# Altium PCB BDC_Motor_V01_220805_ASCII.PcbDoc
Units mil, origin at the board's own origin, x right, y up, seen from the top; angles counter-clockwise.
Board outline 3937.01 x 3937.01 mil, 2 copper layers (Top Layer, Bottom Layer); 91 components, 41 nets, 287 pads, 0 vias.
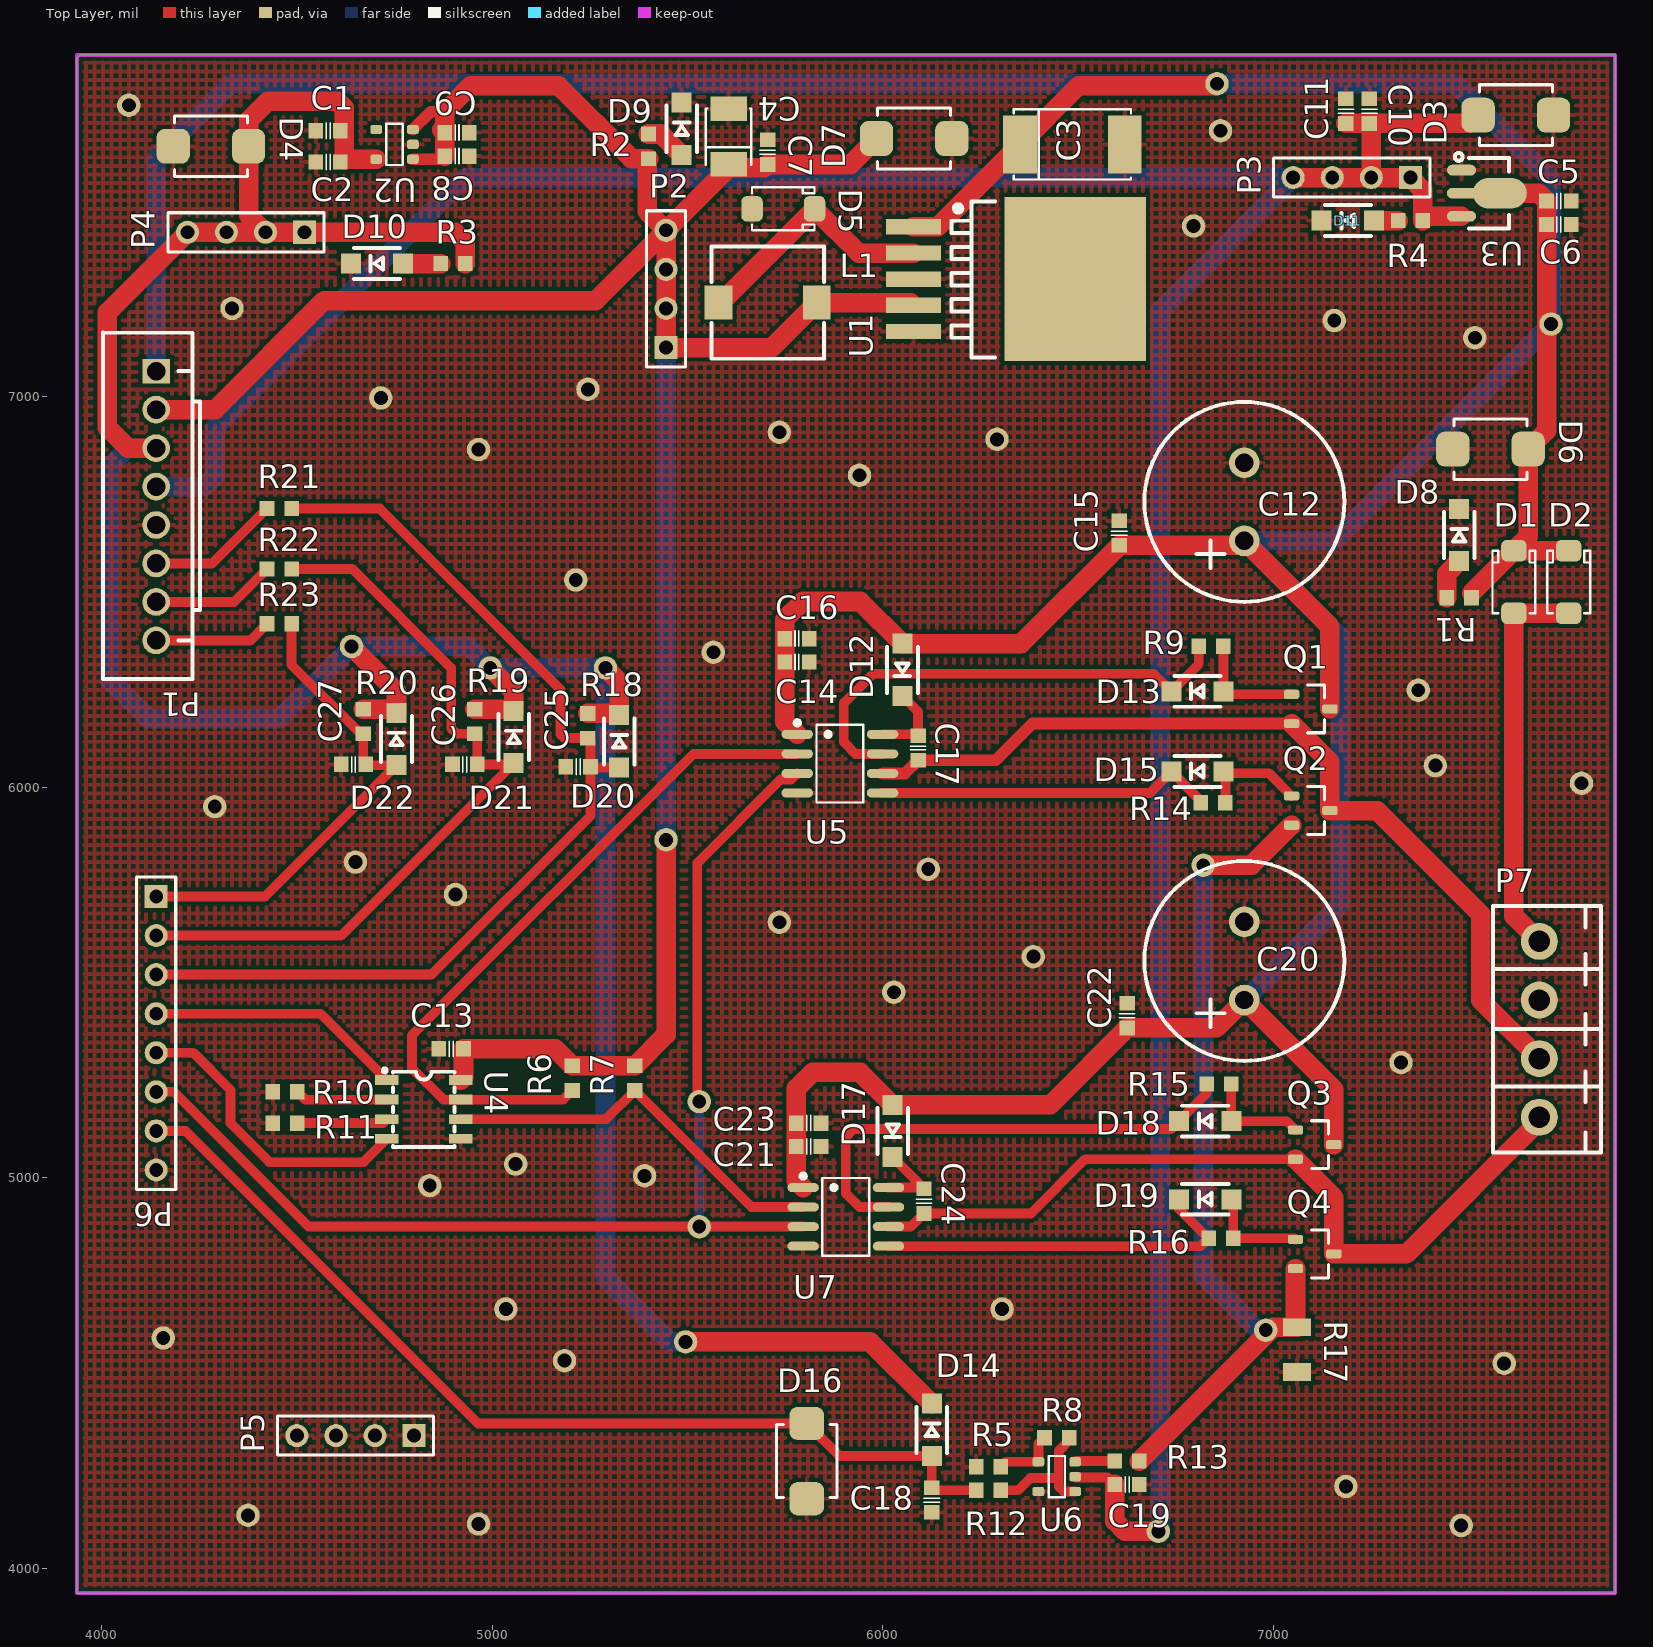
[diagram p0: Top Layer view]
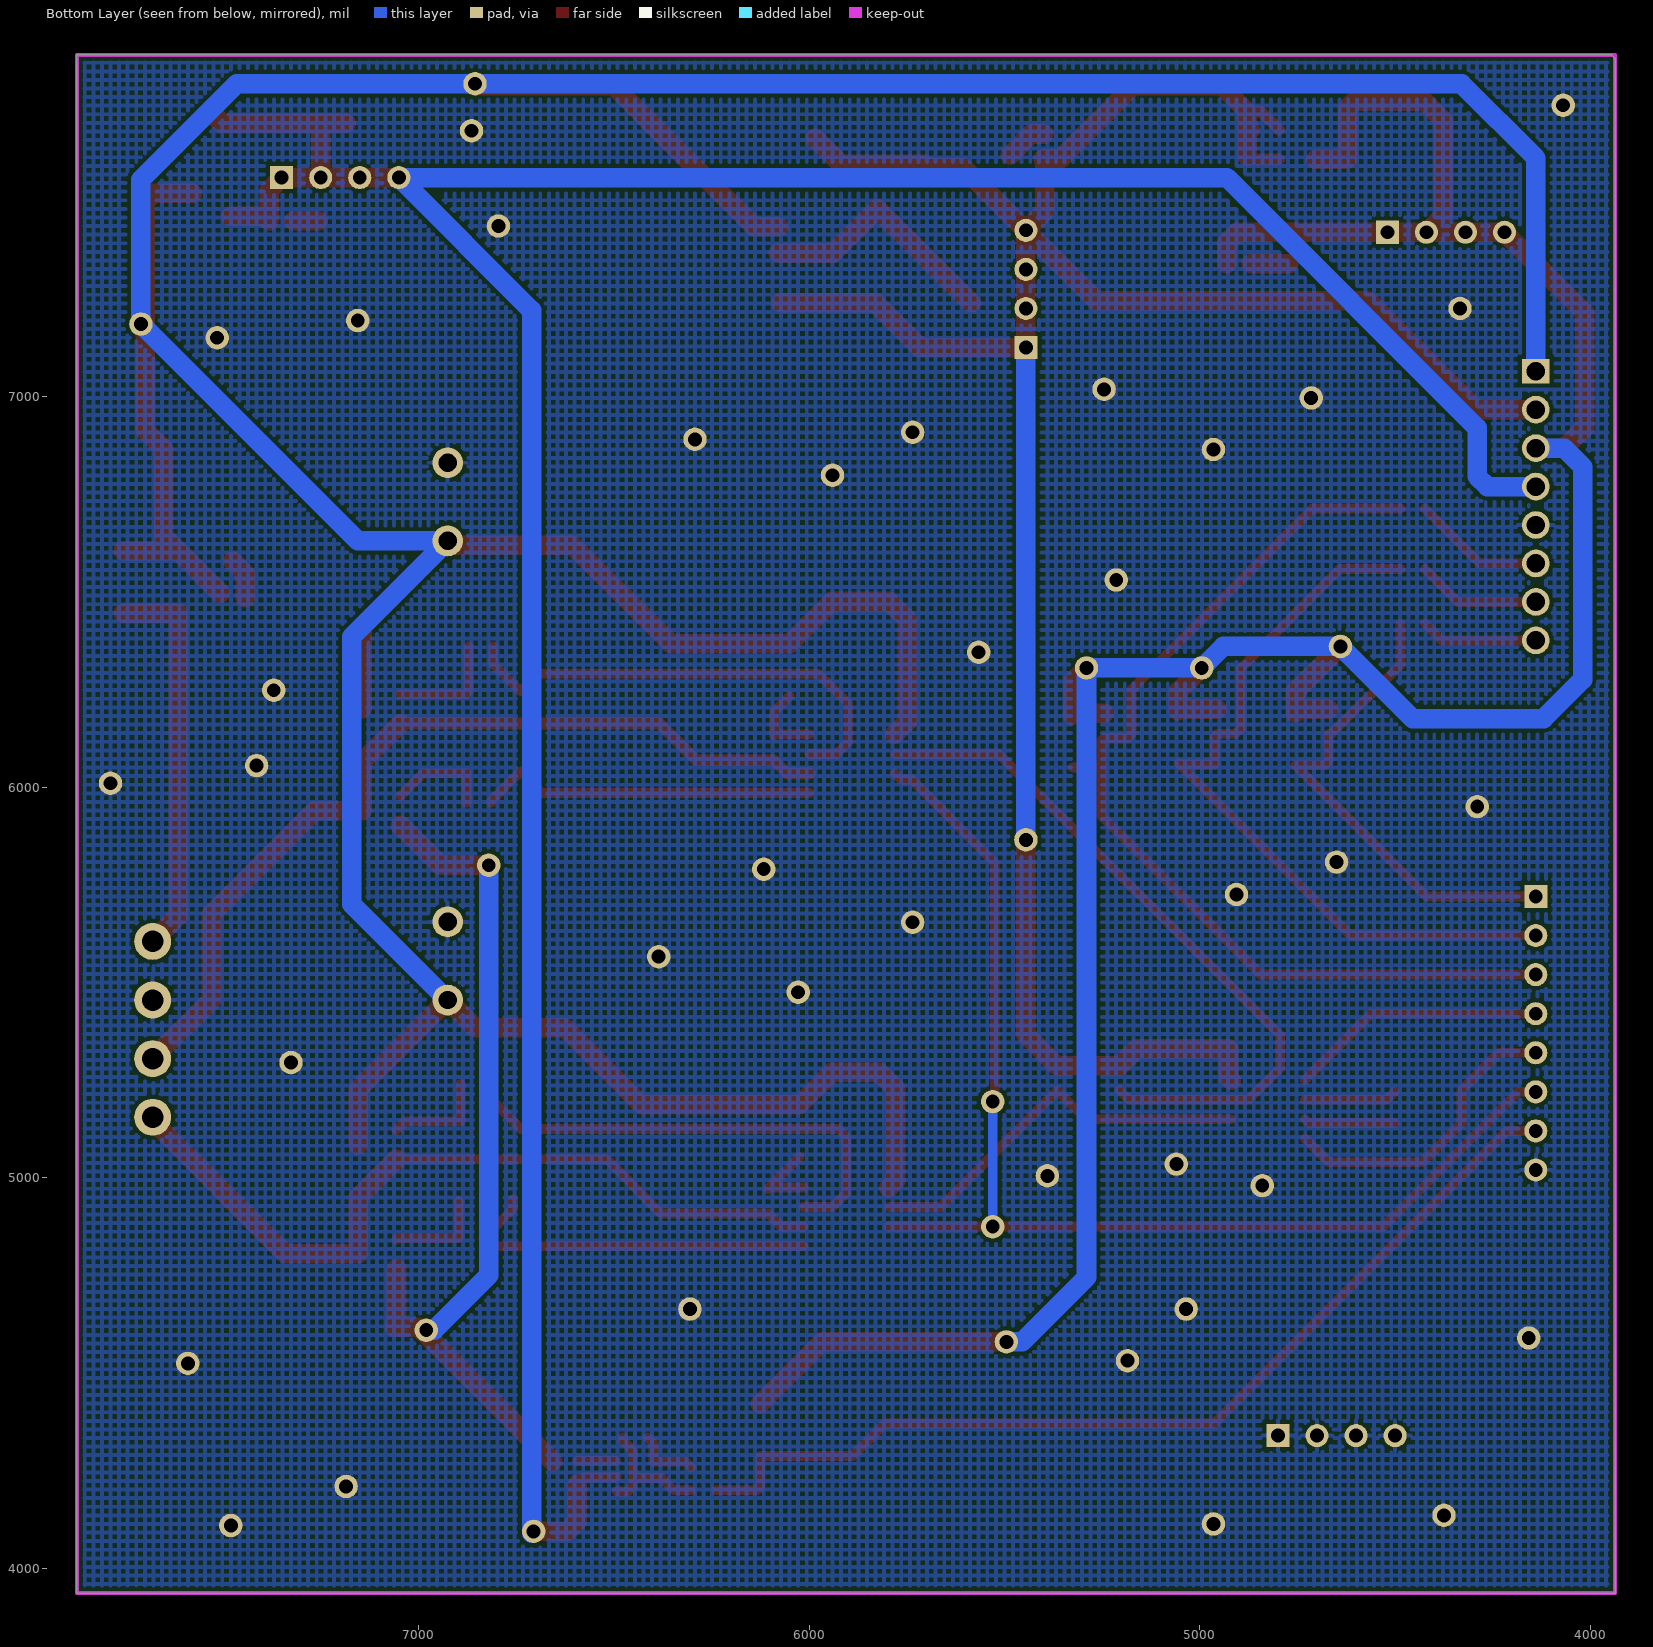
[diagram p1: Bottom Layer view, seen from below]

## Layer stack, top to bottom
Top Layer: signal copper 1.4
Dielectric: dielectric 12.6, FR-4, Dk 4.8
Bottom Layer: signal copper 1.4

## Board outline
3937.01,7865 3946.02,7874.02 7874.02,7874.02 7874.02,3937.01 3937.01,3937.01

## Design rules (kind name [scope] priority, off if disabled: settings)
AssemblyTestPointUsage [All] p0: scope1count=1 scope1_0_kind=Board scope1_0_value=Board scope2count=1 scope2_0_kind=Board scope2_0_value=Board commentlength=0
AssemblyTestpoint [All] p0: scope1count=1 scope1_0_kind=Board scope1_0_value=Board scope2count=1 scope2_0_kind=Board scope2_0_value=Board commentlength=0
Clearance [All] p0: scope1count=1 scope1_0_kind=Board scope1_0_value=Board scope2count=1 scope2_0_kind=Board scope2_0_value=Board commentlength=0 gap=10
Clearance Clearance_1 [All] p0: scope1count=1 scope1_0_kind=Board scope1_0_value=Board scope2count=1 scope2_0_kind=Board scope2_0_value=Board commentlength=0 gap=10
Clearance Clearance_1 [All] p1: gap=10
Clearance [All] p2: gap=10
ComponentClearance [All] p0: scope1count=1 scope1_0_kind=Board scope1_0_value=Board scope2count=1 scope2_0_kind=Board scope2_0_value=Board commentlength=0 gap=10 collisioncheckmode=3
DiffPairsRouting [All] p0: scope1count=1 scope1_0_kind=Board scope1_0_value=Board scope2count=1 scope2_0_kind=Board scope2_0_value=Board commentlength=0
FabricationTestPointUsage [All] p0: scope1count=1 scope1_0_kind=Board scope1_0_value=Board scope2count=1 scope2_0_kind=Board scope2_0_value=Board commentlength=0 valid=0 allowmultiple=FALSE
FabricationTestpoint [All] p0: scope1count=1 scope1_0_kind=Board scope1_0_value=Board scope2count=1 scope2_0_kind=Board scope2_0_value=Board commentlength=0 side=3 testpointundercomponent=TRUE minsize=40 maxsize=100 preferedsize=60 minholesize=0 maxholesize=40 preferedholesize=32 testpointgrid=1
FanoutControl Fanout_BGA [All] p0 off: scope1count=1 scope1_0_kind=Board scope1_0_value=Board scope2count=1 scope2_0_kind=Board scope2_0_value=Board commentlength=69 // Protel DXP Scope 1 Expression Was: IsBGA   Fanout_BGA (Default Rule)
FanoutControl Fanout_LCC [All] p0 off: scope1count=1 scope1_0_kind=Board scope1_0_value=Board scope2count=1 scope2_0_kind=Board scope2_0_value=Board commentlength=69 // Protel DXP Scope 1 Expression Was: IsLCC   Fanout_LCC (Default Rule)
FanoutControl Fanout_SOIC [All] p0 off: scope1count=1 scope1_0_kind=Board scope1_0_value=Board scope2count=1 scope2_0_kind=Board scope2_0_value=Board commentlength=71 // Protel DXP Scope 1 Expression Was: IsSOIC   Fanout_SOIC (Default Rule)
FanoutControl Fanout_Small [All] p0 off: scope1count=1 scope1_0_kind=Board scope1_0_value=Board scope2count=1 scope2_0_kind=Board scope2_0_value=Board commentlength=84 // Protel DXP Scope 1 Expression Was: (CompPinCount < 5)   Fanout_Small (Default Rule)
FanoutControl Fanout_Default [All] p0: scope1count=1 scope1_0_kind=Board scope1_0_value=Board scope2count=1 scope2_0_kind=Board scope2_0_value=Board commentlength=30 // Fanout_Default (Default Rule)
Height [All] p0: scope1count=1 scope1_0_kind=Board scope1_0_value=Board scope2count=1 scope2_0_kind=Board scope2_0_value=Board commentlength=0
HoleSize [All] p0: scope1count=1 scope1_0_kind=Board scope1_0_value=Board scope2count=1 scope2_0_kind=Board scope2_0_value=Board commentlength=0 absolutevalues=TRUE maxlimit=100 minlimit=1 maxpercent=80.000 minpercent=20.000
HoleToHoleClearance [All] p0: scope1count=1 scope1_0_kind=Board scope1_0_value=Board scope2count=1 scope2_0_kind=Board scope2_0_value=Board commentlength=0
LayerPairs [All] p0: scope1count=1 scope1_0_kind=Board scope1_0_value=Board scope2count=1 scope2_0_kind=Board scope2_0_value=Board commentlength=0 enforce=TRUE
MinimumSolderMaskSliver [All] p0: scope1count=1 scope1_0_kind=Board scope1_0_value=Board scope2count=1 scope2_0_kind=Board scope2_0_value=Board commentlength=0
MinimumSolderMaskSliver [All] p1: minsoldermaskwidth=5
NetAntennae [All] p0: scope1count=1 scope1_0_kind=Board scope1_0_value=Board scope2count=1 scope2_0_kind=Board scope2_0_value=Board commentlength=0
PasteMaskExpansion [All] p0: scope1count=1 scope1_0_kind=Board scope1_0_value=Board scope2count=1 scope2_0_kind=Board scope2_0_value=Board commentlength=0 expansion=0
PlaneClearance [All] p0: scope1count=1 scope1_0_kind=Board scope1_0_value=Board scope2count=1 scope2_0_kind=Board scope2_0_value=Board commentlength=0 clearance=20
PlaneConnect [All] p0: scope1count=1 scope1_0_kind=Board scope1_0_value=Board scope2count=1 scope2_0_kind=Board scope2_0_value=Board commentlength=0 planeconnectstyle=Relief reliefexpansion=20 reliefentries=4 reliefconductorwidth=10 reliefairgap=10
PolygonConnect [All] p0: scope1count=1 scope1_0_kind=Board scope1_0_value=Board scope2count=1 scope2_0_kind=Board scope2_0_value=Board commentlength=0 connectstyle=Relief reliefconductorwidth=10 reliefentries=4 polygonreliefangle="90 Angle"
PolygonConnect [All] p1: connectstyle=Relief reliefconductorwidth=10 reliefentries=4 polygonreliefangle="90 Angle"
RoutingCorners [All] p0: scope1count=1 scope1_0_kind=Board scope1_0_value=Board scope2count=1 scope2_0_kind=Board scope2_0_value=Board commentlength=0 cornerstyle=45-Degree minsetback=100 maxsetback=100
RoutingLayers [All] p0: scope1count=1 scope1_0_kind=Board scope1_0_value=Board scope2count=1 scope2_0_kind=Board scope2_0_value=Board commentlength=0 top layer=Automatic bottom layer=Automatic
RoutingPriority [All] p0: scope1count=1 scope1_0_kind=Board scope1_0_value=Board scope2count=1 scope2_0_kind=Board scope2_0_value=Board commentlength=0
RoutingTopology [All] p0: scope1count=1 scope1_0_kind=Board scope1_0_value=Board scope2count=1 scope2_0_kind=Board scope2_0_value=Board commentlength=0 topology=Shortest
RoutingVias [All] p0: scope1count=1 scope1_0_kind=Board scope1_0_value=Board scope2count=1 scope2_0_kind=Board scope2_0_value=Board commentlength=0 holewidth=28 width=50 viastyle="Through Hole" minholewidth=28 minwidth=50 maxholewidth=28 maxwidth=50
RoutingVias [All] p1: holewidth=28 width=50 viastyle="Through Hole" minholewidth=28 minwidth=50 maxholewidth=28 maxwidth=50
ShortCircuit [All] p0: scope1count=1 scope1_0_kind=Board scope1_0_value=Board scope2count=1 scope2_0_kind=Board scope2_0_value=Board commentlength=0 allowed=FALSE
SilkToSilkClearance [All] p0: scope1count=1 scope1_0_kind=Board scope1_0_value=Board scope2count=1 scope2_0_kind=Board scope2_0_value=Board commentlength=0
SilkscreenOverComponentPads [All] p0: scope1count=1 scope1_0_kind=Board scope1_0_value=Board scope2count=1 scope2_0_kind=Board scope2_0_value=Board commentlength=0
SilkscreenOverComponentPads [All] p1: minsilkscreentomaskgap=1
SolderMaskExpansion [All] p0: scope1count=1 scope1_0_kind=Board scope1_0_value=Board scope2count=1 scope2_0_kind=Board scope2_0_value=Board commentlength=0 expansion=4
SolderMaskExpansion [All] p1: expansion=4
UnRoutedNet [All] p0: scope1count=1 scope1_0_kind=Board scope1_0_value=Board scope2count=1 scope2_0_kind=Board scope2_0_value=Board commentlength=0
Width [All] p0: scope1count=1 scope1_0_kind=Board scope1_0_value=Board scope2count=1 scope2_0_kind=Board scope2_0_value=Board commentlength=0 maxlimit=100 minlimit=10 preferedwidth=30
Width [All] p1: maxlimit=100 minlimit=10 preferedwidth=30
26 further rules are at their usual default settings.

## Components (designator, comment, footprint, x,y, rotation, side; value= is the part's Value field where it differs from the comment)
C1 "10uF" C0603 4580,7680 r0 top
C2 "0.1uF" C0603 4580,7600 r0 top
C3 "Cap" CAP-SMD_L7.3-W4.3 6485,7645 r180 top
C4 "Cap" CAP-SMD_L3.5-W2.8 5605,7665 r270 top
C5 "10uF" C0603 7730,7500 r180 top
C6 "0.1uF" C0603 7730,7440 r180 top
C7 "0.1uF" C0603 5705,7625 r270 top
C8 "0.1uF" C0603 4910,7615 r180 top
C9 "10uF" C0603 4910,7675 r180 top
C10 "10uF" C0603 7245,7730 r270 top
C11 "0.1uF" C0603 7185,7730 r270 top
C12 "220uF/100V" CAP-TH_BD13.0-P5.00-D1.2-FD 6925,6730 r90 top
C13 "0.1uF" C0603 4895,5330 r0 top
C14 "4.7uF" C0603 5780,6320 r180 top
C15 "2.2uF" C0603 6605,6650 r90 top
C16 "0.1uF" C0603 5780,6380 r180 top
C17 "4.7uF" C0603 6090,6100 r270 top
C18 "1nF" C0603 6125,4175 r270 top
C19 "0.1uF" C0603 6625,4215 r180 top
C20 "220uF/100V" CAP-TH_BD13.0-P5.00-D1.2-FD 6925,5555 r90 top
C21 "4.7uF" C0603 5810,5080 r180 top
C22 "2.2uF" C0603 6625,5415 r90 top
C23 "0.1uF" C0603 5810,5140 r180 top
C24 "4.7uF" C0603 6105,4940 r270 top
C25 "0.1uF" C0603 5220,6051.93 r180 top
C26 "0.1uF" C0603 4930,6058.07 r180 top
C27 "0.1uF" C0603 4645,6058.07 r180 top
D1 "SS54" DO-214AC 7615,6525 r90 top
D2 "SS54" DO-214AC 7755,6525 r90 top
D3 "SMFJ5.0A" SMBJ-CA_MFG 7620,7720 r180 top
D4 "SMFJ3.3A" SMBJ-CA_MFG 4280,7640 r0 top
D5 "SS54" DO-214AC 5745,7480 r0 top
D6 "SMAJ12CA" SMBJ-CA_MFG 7555,6865 r0 top
D7 "SMFJ5.0A" SMBJ-CA_MFG 6080,7660 r180 top
D8 "LED2" SOD-123FL_L2.6-W1.6-LS3.4-RD 7475,6645 r90 top
D9 "LED2" SOD-123FL_L2.6-W1.6-LS3.4-RD 5485,7685 r90 top
D10 "LED2" SOD-123FL_L2.6-W1.6-LS3.4-RD 4705,7340 r180 top
D11 "LED2" SOD-123FL_L2.6-W1.6-LS3.4-RD 7190,7450 r180 top
D12 "1N4148W" SOD-123FL_L2.6-W1.6-LS3.4-RD 6050,6300 r270 top
D13 "1N4148W" SOD-123FL_L2.6-W1.6-LS3.4-RD 6805,6245 r180 top
D14 "1N4148W" SOD-123FL_L2.6-W1.6-LS3.4-RD 6125,4355 r90 top
D15 "1N4148W" SOD-123FL_L2.6-W1.6-LS3.4-RD 6805,6040 r180 top
D16 "SMFJ3.3A" SMBJ-CA_MFG 5805,4275 r90 top
D17 "1N4148W" SOD-123FL_L2.6-W1.6-LS3.4-RD 6025,5120 r270 top
D18 "1N4148W" SOD-123FL_L2.6-W1.6-LS3.4-RD 6825,5145 r180 top
D19 "1N4148W" SOD-123FL_L2.6-W1.6-LS3.4-RD 6825,4945 r180 top
D20 "1N4148W" SOD-123FL_L2.6-W1.6-LS3.4-RD 5325,6116.93 r90 top
D21 "1N4148W" SOD-123FL_L2.6-W1.6-LS3.4-RD 5055,6128.07 r90 top
D22 "1N4148W" SOD-123FL_L2.6-W1.6-LS3.4-RD 4755,6123.07 r90 top
L1 "33uH" IND-SMD_L7.3-W7.3_YPRH0704 5705,7240 r0 top
P1 "Header 8" CONN-TH_8P-P2.50_ZH-8A 4140,6720 r270 top
P2 "Header 4" HDR1X4 5445,7125 r90 top
P3 "Header 4" HDR1X4 7350,7560 r180 top
P4 "Header 4" HDR1X4 4520,7420 r180 top
P5 "Header 4" HDR1X4 4800,4340 r180 top
P6 "Header 8" HDR1X8 4140,5720 r270 top
P7 "Header 4" CONN-TH_4P-P3.81_KF2EDGV-3.81-4P 7680,5380 r90 top
Q1 "AO3400A" SOT23-3 7095,6200 r0 top
Q2 "AO3400A" SOT23-3 7095,5940 r0 top
Q3 "AO3400A" SOT23-3 7105,5085 r0 top
Q4 "AO3400A" SOT23-3 7105,4805 r0 top
R1 "10K" R0603 7475,6485 r180 top
R2 "10K" R0603 5400,7640 r90 top
R3 "10K" R0603 4900,7340 r180 top
R4 "10K" R0603 7350,7450 r180 top
R5 "1K" R0603 6270,4260 r0 top
R6 "470" R0603 5205,5255 r90 top
R7 "470" R0603 5365,5255 r90 top
R8 "10K" R0603 6445,4335 r180 top
R9 "100" R0603 6840,6360 r180 top
R10 "300" R0603 4470,5220 r0 top
R11 "300" R0603 4470,5140 r0 top
R12 "100" R0603 6270,4200 r0 top
R13 "1K" R0603 6625,4275 r0 top
R14 "100" R0603 6845,5960 r180 top
R15 "100" R0603 6860,5240 r180 top
R16 "100" R0603 6865,4845 r180 top
R17 "0R1" R1206 7060,4560 r270 top
R18 "4.7K" R0603 5245,6156.93 r270 top
R19 "4.7K" R0603 4955,6168.07 r270 top
R20 "4.7K" R0603 4670,6168.07 r270 top
R21 "1K" R0603 4455,6713.07 r180 top
R22 "1K" R0603 4455,6558.07 r180 top
R23 "1K" R0603 4455,6418.07 r180 top
U1 "RS2596U" TO-263-5_L10.2-W8.9-P1.70-LS15.2-BR 6285,7300 r180 top
U2 "ME6211C33" SOT23-5 4750,7645 r180 top
U3 "HT7333-3" SOT-89-3_L4.5-W2.5-P1.50-LS4.1-BR 7530,7520 r180 top
U4 "EL0631(TA)" SOP-8-SMD-8_L4.9-W4.0-P1.27-LS5.9-BL 4825,5175 r270 top
U5 "IR2104STRPBF" SOIC-8_L4.9-W3.9-P1.27-LS6.0-BL 5890,6060 r270 top
U6 "OPA330" SOT23-5 6445,4235 r180 top
U7 "IR2104STRPBF" SOIC-8_L4.9-W3.9-P1.27-LS6.0-BL 5905,4900 r270 top

## Footprints (in the part's own frame and the unit in brackets; to place one, negate y for a bottom-side part, rotate by r counter-clockwise, add the part's x,y. Pads: shape width x height; smd on the part's side, far side on the other; paste and mask are expansions set on the pad)
C0603 [mm] "SMD, 0603"
  rect 0.95x1 smd: 1(-0.8,0) 2(0.8,0)
  silkscreen extent -0.13,-0.51 0.13,0.51
CAP-SMD_L3.5-W2.8 [mil]
  rect 63.3x93.5 smd: 1(71,0) 2(-71,0)
  silkscreen extent -72,-58 72,58
CAP-SMD_L7.3-W4.3 [mm]
  rect 2.185x3.78 smd: 1(3.406,0) 2(-3.406,0)
  silkscreen extent -3.81,-2.29 3.81,2.29
CAP-TH_BD13.0-P5.00-D1.2-FD [mil]
  round 78.7 hole 47.2: 1(-100,0) 2(100,0)
  silkscreen extent -256,-256 256,256
CONN-TH_4P-P3.81_KF2EDGV-3.81-4P [mm]
  round 2.4 hole 1.4: 1(-5.715,0) 2(-1.905,0) 3(1.905,0) 4(5.715,0)
  silkscreen extent -8.02,-4 8.02,3
CONN-TH_8P-P2.50_ZH-8A [mil]
  rect 63x70.9 hole 47.2: 1(-344.5,0)
  round 70.9 hole 47.2: 2(-246.1,0) 3(-147.6,0) 4(-49.2,0) 5(49.2,0) 6(147.6,0) 7(246.1,0) 8(344.5,0)
  silkscreen extent -443,-136 443,112
DO-214AC [mil] "SMA"
  rrect50% 55x65 smd: 1(80,0) 2(-80,0)
  silkscreen extent -80,-55 80,55
HDR1X4 [mm] "Connector; Header; 4 Position"
  rect 1.5x1.5 hole 0.9: 1(0,0)
  round 1.5 hole 0.9: 2(2.54,0) 3(5.08,0) 4(7.62,0)
  silkscreen extent -1.27,-1.27 8.89,1.27
HDR1X8 [mm] "Connector; Header; 8 Position"
  rect 1.5x1.5 hole 0.9: 1(0,0)
  round 1.5 hole 0.9: 2(2.54,0) 3(5.08,0) 4(7.62,0) 5(10.16,0) 6(12.7,0) 7(15.24,0) 8(17.78,0)
  silkscreen extent -1.27,-1.27 19.05,1.27
IND-SMD_L7.3-W7.3_YPRH0704 [mm]
  rect 1.8x2.2 smd: 1(-3.2,0) 2(3.2,0)
  silkscreen extent -3.65,-3.65 3.65,3.65
R0603 [mm] "SMD, 0603"
  rect 0.95x1 smd: 1(-0.8,0) 2(0.8,0)
R1206 [mm] "SMD, 1206"
  rect 1.15x1.8 smd: 1(-1.45,0) 2(1.45,0)
SMBJ-CA_MFG [mm]
  rrect50% 2.16x2.26 smd: 1(-2.45,0) 2(2.45,0)
  silkscreen extent -2.37,-1.97 2.37,1.97
SOD-123FL_L2.6-W1.6-LS3.4-RD [mm]
  rect 1.3x1.3 smd: 1(1.7,0) 2(-1.7,0)
  silkscreen extent -1.5,-1 1.5,1
SOIC-8_L4.9-W3.9-P1.27-LS6.0-BL [mm]
  oval 0.588x2.045 smd: 1(-1.905,-2.772) 2(-0.635,-2.772) 3(0.635,-2.772) 4(1.905,-2.772) 5(1.905,2.772) 6(0.635,2.772) 7(-0.635,2.772) 8(-1.905,2.772)
  silkscreen extent -2.8,-2.92 2.53,1.52
SOP-8-SMD-8_L4.9-W4.0-P1.27-LS5.9-BL [mil]
  rect 25.2x59.8 smd: 1(-75,-94.5) 2(-25,-94.5) 3(25,-94.5) 4(75,-94.5) 5(75,94.5) 6(25,94.5) 7(-25,94.5) 8(-75,94.5)
  silkscreen extent -105,-105 97,79
SOT23-3 [mm] "SOT23, 3-Leads, Body 3.1x3.0mm (max), Pitch 0.95mm, IPC Medium Density"
  rrect50% 1x0.6 smd: 1(-1.246,0.95) 2(-1.246,-0.95) 3(1.246,0)
  silkscreen extent -0.2,-1.55 0.9,1.55
SOT23-5 [mil]
  rrect50% 30x24 smd: 1(-47,38) 2(-47,0) 3(-47,-38) 4(47,-38) 5(47,38)
  silkscreen extent -21,-53 21,53
SOT-89-3_L4.5-W2.5-P1.50-LS4.1-BR [mm]
  oval 1.9x0.7 smd: 1(1.25,-1.501) 3(1.25,1.501)
  oval 3.5x2 smd: 2(-1.25,0)
  oval 2.1x0.7 smd: 2(1.151,0)
  silkscreen extent -1.85,-2.61 1.68,2.3
TO-263-5_L10.2-W8.9-P1.70-LS15.2-BR [mil]
  rect 141.7x39.4 smd: 1(206.7,-133.9) 2(206.7,-66.9) 3(206.7,0) 4(206.7,66.9) 5(206.7,133.9)
  rect 362.2x420 smd: 6(-206.7,0)
  silkscreen extent -2,-199 110,201

## Part data
C1 C2 C5 C6 C7 C8 C9 C10 C11 C13 C14 C15 C16 C17 C18 C19 C21 C22 C23 C24 C25 C26 C27: library part 电容, "Capacitor"
C3 C4 C12 C20: library part 极性电容
D1 D2 D5: library part Diode_SMA, "Diode"
D3 D4 D6 D7 D16: library part SMBJ28CA
D8 D9 D10 D11: "Typical RED, GREEN, YELLOW, AMBER GaAs LED"
L1: library part 电感
P1 P6: "Header, 8-Pin"
P2 P3 P4 P5 P7: "Header, 4-Pin"
Q1 Q2 Q3 Q4: "N-MOS"
R1 R2 R3 R4 R5 R6 R7 R8 R9 R10 R11 R12 R13 R14 R15 R16 R17 R18 R19 R20 R21 R22 R23: library part 电阻, "Resistor"
U2: "LDO"

## Free pads (board coordinates)
  round 60 hole 35.43: 0(6855,7800) 1(7710,7185) 2(5530,5195) 3(5530,4875) 4(4640,6360) 9(4995,6305) 11(5290,6305) 14(5495,4580) 15(6705,4095) 16(5445,5865) 17(6820,5800) 19(6980,4610) 20(4375,4136) 21(4965,4114) 22(7480,4110) 23(7590,4525) 24(6305,4664) 25(5035,4664) 26(4158,4590) 27(5060,5035) 28(6028,5475) 29(7326,5295) 30(7788,6010) 31(7370,6248) 32(6116,5790) 33(4290,5950) 34(4334,7225) 35(4965,6864) 36(4070,7745) 37(5245,7018) 38(5214,6530) 39(4715,6996) 40(5735,6908) 41(6292,6890) 42(5940,6798) 43(5566,6345) 44(7155,7194) 45(7515,7150) 46(6864,7680) 47(6795,7436) 48(7414,6055) 49(6385,5566) 50(5735,5654) 51(4906,5725) 52(4650,5808) 53(5185,4532) 54(4840,4980) 55(5390,5005) 56(7185,4210)

## Nets (pads, with @x,y where several pads share a name; then routed paths per layer and width w, separated by ;. In a path a pad name is that pad's centre, name@x,y a point inside that pad or via, vN(x,y) a via of type N, cw(c..) or ccw(c..) an arc to the next point about the centre after c; other vN are vias at no path point)
AGND: C1.1 C2.1 C3.2 C4.2 C5.1 C6.1 C7.1 C8.1 C9.1 C10.1 C11.1 C12.2 C13.1 C14.1 C15.2 C16.1 C18.2 C19.1 C20.2 C21.1 C22.2 C23.1 C25.2 C26.2 C27.2 D3.1 D4.1 D5.2 D6.1 D7.1 D8.1 D9.1 D10.1 D11.1 D16.1 P1.5 P5.1 P5.2 P5.3 P5.4 P6.8 P7.3 pad.20 pad.21 pad.22 pad.23 pad.24 pad.25 pad.26 pad.27 pad.28 pad.29 pad.30 pad.31 pad.32 pad.33 pad.34 pad.35 pad.36 pad.37 pad.38 pad.39 pad.40 pad.41 pad.42 pad.43 pad.44 pad.45 pad.46 pad.47 pad.48 pad.49 pad.50 pad.51 pad.52 pad.53 pad.54 pad.55 pad.56 R5.1 R10.1 R11.1 R17.2 U1.3 U1.5 U2.2 U3.1 U4.5 U5.4 U6.5 U7.4
CURT: C18.1 D14.2 D16.2 P6.7 R12.1 | length 2527.4
  Top Layer w25: P6.7 4215,5120 4963.54,4371.46 D16.2 5888.39,4288.07 D14.2 C18.1 6131.5,4200 R12.1
ENCA: C27.1 D22.2 P6.1 R20.2 R23.1 | length 1276.5
  Top Layer w25: P6.1 4418.86,5720 D22.2 4678.43,6056.14 4670,6064.57 R20.2 4662.79,6136.57 4486.5,6312.87 R23.1
ENCB: C26.1 D21.2 P6.2 R19.2 R22.1 | length 2003.2
  Top Layer w25: P6.2 4613.86,5620 D21.2@5051.93,6058.07 ; R22.1 4641.93,6558.07 4895,6305 4895,6150 4908.43,6136.57 R19.2 4961.5,6130.08 C26.1 D21.2@5051.93,6058.07 ; D21.2 D21.2@5051.93,6058.07
ENCZ: C25.1 D20.2 P6.3 R18.2 R21.1 | length 2625.1
  Top Layer w25: P6.3 4845,5520 5251.5,5926.5 C25.1 ; R21.1 4711.93,6713.07 5175,6250 5175,6135 5184.57,6125.43 R18.2 5251.5,6118.94 C25.1 ; D20.2 5253.43,6050 C25.1
I-V: pad.17 pad.19 Q2.2 Q4.2 R13.2 R17.1 | length 2228.1
  Top Layer w50: R13.2 6998.58,4617.09 R17.1 ; pad.17 6943.35,5800 Q2.2 ; R17.1@7055.94,4621.14 Q4.2
  Bottom Layer w50: pad.17 6820,4750 6960,4610 pad.19
MOTOR+: C17.2 P7.2 Q1.2 Q2.3 U5.6 | length 2290.7
  Top Layer w30: U5.6 6056.5,6035 C17.2 6288.5,6068.5 6382.6,6162.6 Q1.2
  Top Layer w50: Q1.2 7144.06,6064.49 Q2.3 7265,5940 7530,5675 7530,5455 P7.2
MOTOR-: C24.2 P7.1 Q3.2 Q4.3 U7.6 | length 2077.4
  Top Layer w25: U7.6 6071.5,4875 C24.2 6378.5,4908.5 6517.6,5047.6 Q3.2
  Top Layer w50: Q3.2 7154.06,4949.49 Q4.3 7340,4805 7685,5150 P7.1
NetC17_1: C17.1 D12.1 U5.8 | length 210.4
  Top Layer w25: U5.8 6086.5,6135 C17.1 6090,6193.07 D12.1
NetC24_1: C24.1 D17.1 U7.8 | length 207
  Top Layer w25: U7.8 6101.5,4975 C24.1 6105,4973.07 D17.1
NetD5_1: D5.1 L1.1 U1.2 | length 639.6
  Top Layer w50: L1.1@5585,7240 D5.1 5938.1,7366.9 U1.2
NetD8_2: D8.2 R1.2 | length 106.1
  Top Layer w50: R1.2 7443.5,6546.57 D8.2
NetD9_2: D9.2 R2.2 | length 107.1
  Top Layer w50: R2.2 5431.57,7671.5 D9.2
NetD10_2: D10.2 R3.2 | length 96.6
  Top Layer w50: D10.2 R3.2
NetD11_2: D11.2 R4.2 | length 61.6
  Top Layer w50: D11.2 R4.2
NetD13_1: D13.1 R9.2 U5.7 | length 1243.5
  Top Layer w25: U5.7 5930,6085 5900,6115 5900,6215 5975,6290 6693.07,6290 D13.1 6808.5,6315.43 R9.2
NetD13_2: D13.2 Q1.1 R9.1 | length 285.3
  Top Layer w25: D13.2@6871.5,6245.43 R9.1 ; D13.2@6876.5,6240.43 6879.53,6237.4 Q1.1
NetD15_1: D15.1 R14.2 U5.5 | length 872.9
  Top Layer w25: U5.5 6683.07,5985 D15.1 6813.5,5964.57 R14.2
NetD15_2: D15.2 Q2.1 R14.1 | length 268.9
  Top Layer w25: R14.1 6876.5,6035.43 6987.91,6035.43 Q2.1
NetD18_1: D18.1 R15.2 U7.7 | length 1262.5
  Top Layer w25: U7.7 5940,4925 5905,4960 5905,5105 5925,5125 6738.07,5125 D18.1 6828.5,5215.43 R15.2
NetD18_2: D18.2 Q3.1 R15.1 | length 267.9
  Top Layer w25: D18.2@6891.5,5145.43 R15.1 ; D18.2 7033.35,5145 Q3.1
NetD19_1: D19.1 R16.2 U7.5 | length 958.9
  Top Layer w25: U7.5 6813.5,4825 R16.2 6758.07,4920.43 D19.1
NetD19_2: D19.2 Q4.1 R16.1 | length 256
  Top Layer w25: D19.2@6896.5,4940.43 R16.1 7053.35,4845 Q4.1
NetP1_6: P1.6 R21.2 | length 341.8
  Top Layer w25: P1.6 4282.83,6572.4 R21.2
NetP1_7: P1.7 R22.2 | length 318.4
  Top Layer w25: P1.7 4339.33,6473.9 R22.2
NetP1_8: P1.8 R23.2 | length 301.1
  Top Layer w25: P1.8 4380.93,6375.5 R23.2
NetR5_2: R5.2 R8.2 U6.4 | length 170.3
  Top Layer w25: R5.2 6314.5,4273 U6.4 6398,4319.5 R8.2
NetR6_1: R6.1 U4.7 U5.2 | length 1822
  Top Layer w25: R6.1 5181.5,5200 U4.7 4875,5200 4795,5280 4795,5365 5515,6085 U5.2
NetR7_1: R7.1 U4.6 U7.2 | length 1030.4
  Top Layer w25: U4.6 5291.5,5150 R7.1 5663.5,4925 U7.2
NetR8_1: R8.1 R12.2 U6.1 | length 341.4
  Top Layer w25: R12.2 6345.69,4200 6377.19,4231.5 6446.5,4231.5 ; R8.1 6476.5,4327.79 6450,4301.29 6450,4210 6463,4197 U6.1
NetR10_2: R10.2 U4.2 | length 237.3
  Top Layer w25: R10.2 4521.5,5200 U4.2
NetR11_2: R11.2 U4.3 | length 233.1
  Top Layer w25: R11.2 4720.5,5140 U4.3
NetR13_1: R13.1 U6.3 | length 99.5
  Top Layer w25: U6.3@6494,4275 R13.1
PWM_UH: P6.4 U4.1 | length 660.9
  Top Layer w25: P6.4 4560.5,5420 U4.1
PWM_UL: P6.5 U4.4 | length 781.1
  Top Layer w25: P6.5 4235,5320 4330,5225 4330,5140 4430,5040 4670.5,5040 U4.4
SD_IN: P6.6 pad.2 pad.3 U5.3 U7.3 | length 3060.5
  Top Layer w25: P6.6 4185,5220 4530,4875 U7.3 ; pad.2@5525,5205 5525,5806.02 5738.05,6019.07 5764.93,6019.07 U5.3
  Bottom Layer w25: pad.3@5530,4885 pad.2
V3.3: C1.2 C2.2 D4.2 D14.1 D20.1 D21.1 D22.1 P1.3 P4.1 P4.2 P4.3 P4.4 pad.4 pad.9 pad.11 pad.14 R3.1 R18.1 R19.1 R20.1 U2.5 | length 7680.6
  Top Layer w50: P1.3 4067.4,6867.6 4015,6920 4015,7215 P4.4 P4.3 P4.2 ; pad.4 4755,6245 D22.1 4745.43,6199.57 R20.1 ; U2.5 4624.5,7607 4621.5,7610 4621.5,7665 4621.5,7738.5 4605,7755 4425,7755 4376.46,7706.46 D4.2 4376.46,7463.54 P4.2 ; R3.1 4931.5,7393.5 4905,7420 P4.1 P4.2 ; R19.1 5050.43,6199.57 D21.1 5055,6245 pad.9 ; R18.1 5320.43,6188.43 D20.1 5325,6270 pad.11 ; pad.14 5966.93,4580 D14.1
  Bottom Layer w50: P1.3 4067.6,6867.6 4020,6820 4020,6275 4120,6175 4455,6175 pad.4 4940,6360 pad.9 pad.11 5290,4745 5455,4580 pad.14
V5: C4.1 C7.2 C8.2 C9.2 C13.2 D7.2 L1.2 P1.2 P2.1 P2.2 P2.3 P2.4 pad.16 R2.1 R6.2 R7.2 U1.4 U2.1 U2.3 U4.8 | length 6644.3
  Top Layer w30: U2.1 4870.5,7607 C8.2 ; U2.3 4842.5,7728.5 4878.5,7728.5
  Top Layer w50: P1.2@4143.91,6966.1 P1.2 4291.1,6966.1 4570,7245 4590,7245 5265,7245 P2.4 ; C9.2@4870.5,7683 C9.2 ; C8.2 C9.2 ; U4.8 4926.5,5257 C13.2 5161.5,5330 R6.2 R7.2 5445,5366.5 pad.16 ; R2.1@5396.5,7605 5396.5,7473.5 P2.4 ; R2.1 5356.5,7608.5 5170,7795 4945,7795 4878.5,7728.5 C9.2 ; C7.2@5696.5,7585 5605,7585 P2.4 ; C7.2 5917.05,7593.5 D7.2 ; U1.4@6071.4,7240 L1.2 5715.98,7125 P2.1 P2.2 P2.3 P2.4
  Bottom Layer w50: pad.16 P2.1
V5A: C10.2 C11.2 C19.2 D3.2 P1.4 P3.1 P3.2 P3.3 P3.4 pad.15 R4.1 U3.3 U6.2 | length 8246.4
  Top Layer w25: U6.2 6494.19,4232.81 6575.69,4232.81 C19.2
  Top Layer w50: C19.2 6593.5,4121.5 6620,4095 pad.15 ; P3.4 P3.3 P3.2 ; C11.2 C10.2 ; R4.1 7381.5,7528.5 P3.1 P3.2 ; R4.1@7392.4,7460.9 U3.3 ; D3.2 7502.05,7698.5 C10.2 ; C10.2 7250,7693.5 P3.2
  Bottom Layer w50: P1.4 4264.2,6769.2 4290,6795 4290,6919.2 4930.8,7560 P3.4 6710,7220 6710,4185 pad.15@6710,4090
V12: C3.1 C5.2 C6.2 C12.1 C14.2 C15.1 C16.2 C20.1 C21.2 C22.1 C23.2 D1.1 D2.1 D6.2 D12.2 D17.2 P1.1 pad.0 pad.1 Q1.3 Q3.3 R1.1 U1.1 U3.2 U5.1 U7.1 | length 13537.3
  Top Layer w50: U5.1 5748.5,6167.35 C14.2 C16.2 5748.5,6428.5 5795,6475 5941.93,6475 D12.2 6353.43,6366.93 C15.1 6913.5,6618.5 C12.1 7144.06,6410.94 Q1.3 ; U7.1 5778.5,4992.35 5778.5,5228.5 5820,5270 5941.93,5270 D17.2 6428.43,5186.93 C22.1 6853.5,5383.5 C20.1 7154.06,5225.94 Q3.3 ; U1.1 6139.8,7433.9 C3.1 6500.9,7795 pad.0@6845,7795 ; R1.1@7506.5,6496.5 D1.1 ; U3.2@7579.2,7520 7678.5,7520 C5.2 C6.2 7698.5,6912.05 D6.2 7651.46,6641.46 D1.1 ; D2.1 D1.1
  Bottom Layer w50: P1.1 4140,7610 4330,7800 pad.0 7465,7800 7710,7555 pad.1 7155,6630 C12.1 7170,6385 7170,5700 C20.1
VIN: D1.2 D2.2 P7.4 | length 1006.9
  Top Layer w50: P7.4 7615,5670 D1.2 D2.2
pads on no net: U1.6 U2.4

## Polygon pours and split planes (outlines as drawn)
AGND on Top Layer "Keep-Out Layer-No Net" (hatched 90Degree grid 22 track 10, remove dead copper, pour order 1000): 3945,7874.02 7865,7874.02 7874.02,7865 7874.02,3945 3942.01,3945 3937.01,3950
AGND on Bottom Layer "Keep-Out Layer-No Net" (hatched 90Degree grid 22 track 10, remove dead copper, pour order 1001): 3937.01,7874.02 7874.02,7874.02 7874.02,3937.01 7861.02,3950 3937.01,3950

## Keep-outs
Keep-Out Layer:
  lines w10: 3937.01,3937.01 3937.01,7874.02 7874.02,7874.02 7874.02,3937.01 3937.01,3937.01

## Text inside footprints (layer, text, board x,y; h text height)
D3: Mechanical 13 "D11" at 7130,7330 h60